# Altium PCB PCB1.PcbDoc
Units mm, origin at the board's own origin, x right, y up, seen from the top; angles counter-clockwise.
Board outline 160 x 100 mm, 2 copper layers (Top Layer, Bottom Layer), stack 1.569 mm thick; 19 components, 13 nets, 106 pads, 187 vias.
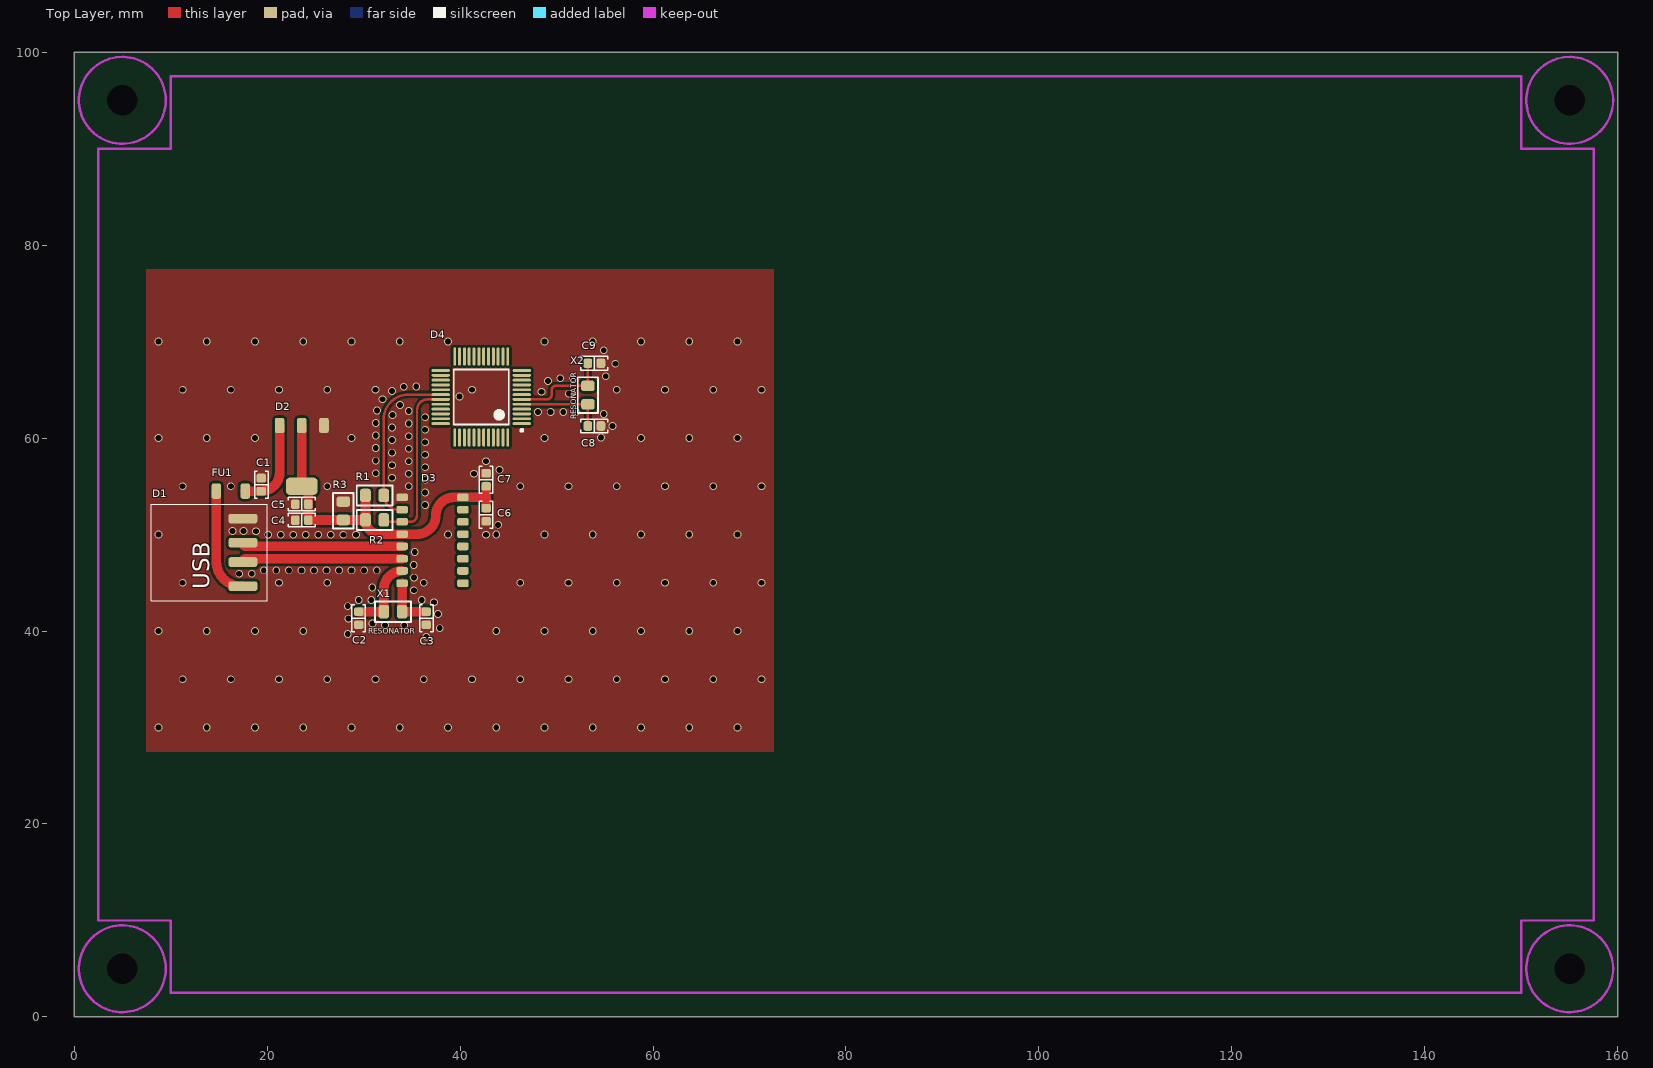
[diagram p0: Top Layer view]
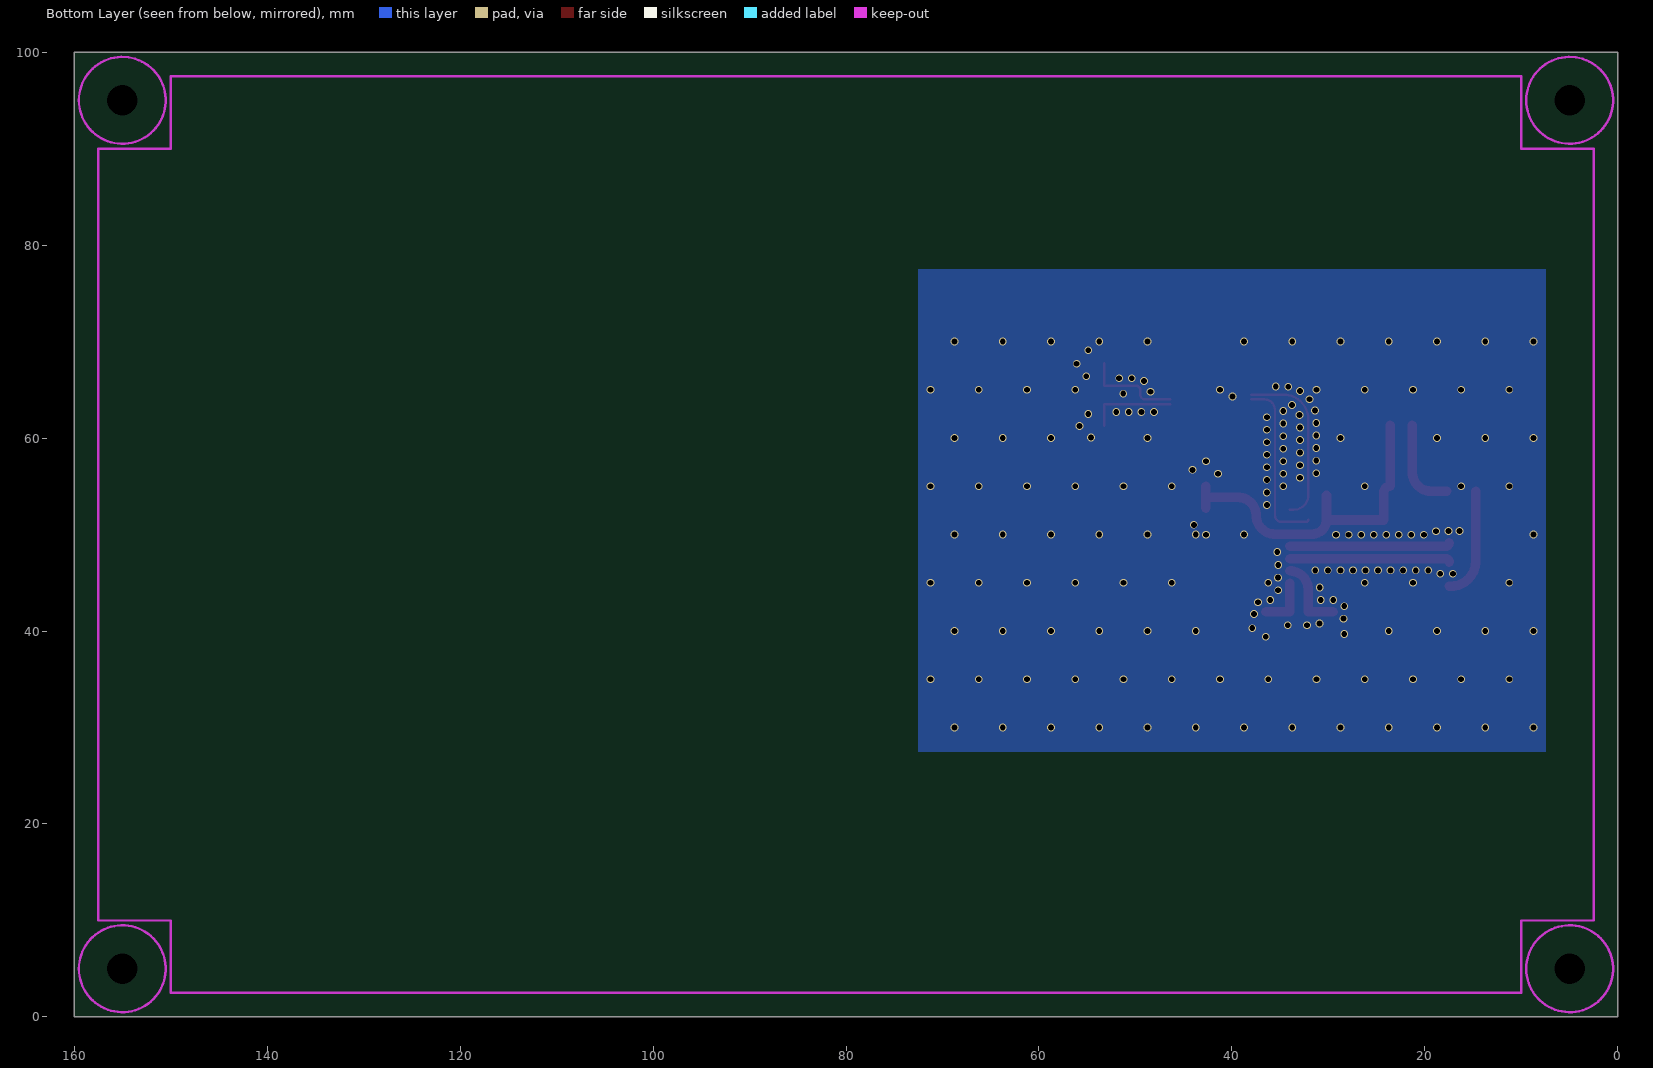
[diagram p1: Bottom Layer view, seen from below]
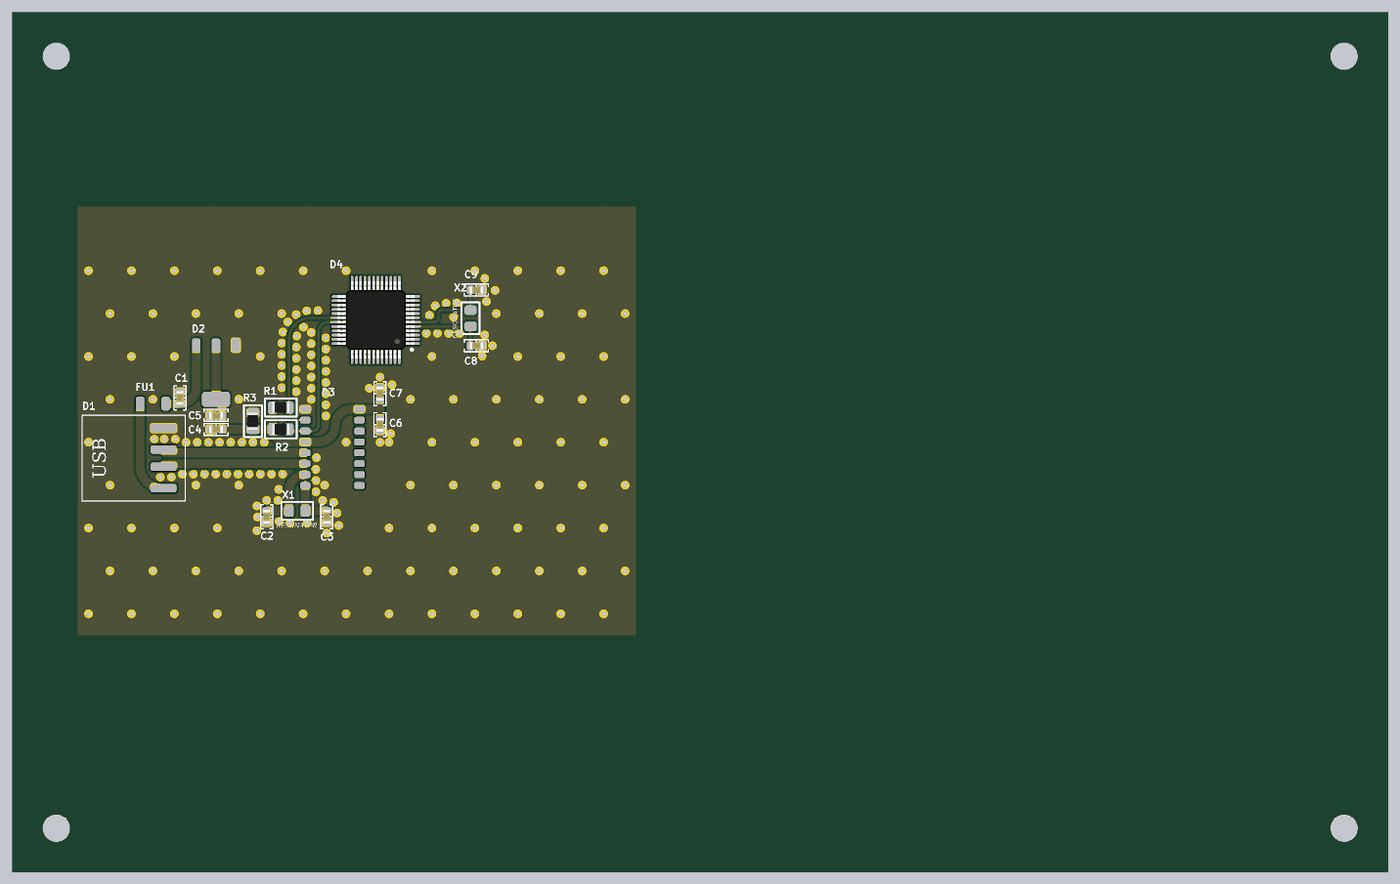
[diagram p2: 3D render of the assembled board from above, using the file's embedded part models]

## Layer stack, top to bottom
Top Solder: solder mask 0.01, Solder Resist, Dk 3.5
Top Layer: signal copper 0.035
Dielectric 1: core 1.4986, Core-043, Dk 4.3
Bottom Layer: signal copper 0.035
Bottom Solder: solder mask 0.01, Solder Resist, Dk 3.5

## Board outline
0,0 0,100 160,100 160,0

## Design rules (kind name [scope] priority, off if disabled: settings)
Clearance [All] p1: gap=0.254 ignorepadtopadclearanceinfootprint=FALSE except(0: Arc-Hole Track-Hole SMDPad-Hole THPad-Hole Via-Hole Fill-Hole Poly-Hole Region-Hole Text-Hole; 0.1: Arc-Arc Arc-Track Arc-SMDPad Track-Track Track-SMDPad SMDPad-SMDPad)
PlaneConnect [All] p1: planeconnectstyle=Direct reliefexpansion=0.508 reliefentries=4 reliefconductorwidth=0.254 reliefairgap=0.254
PolygonConnect [All] p1: connectstyle=Direct reliefconductorwidth=0.254 reliefentries=4 polygonreliefangle="90 Angle" airgapwidth=0.254
RoutingVias [All] p1: holewidth=0.6 width=0.8 viastyle="Through Hole" minholewidth=0.1 minwidth=0.1 maxholewidth=10 maxwidth=10
SolderMaskExpansion [All] p1: expansion=0.102 istentingtop=FALSE
Width [All] p1: maxlimit=5 minlimit=0.254 preferedwidth=1 minimp=50.000000 maximp=50.000000 favimp=50.000000
29 further rules are at their usual default settings.

## Classes and differential pairs
component class Sheet1: C1 C2 C3 C4 C5 C6 C7 C8 C9 D1 D2 D3 D4 FU1 R2 X1 X2 X?

## Components (designator, comment, footprint, x,y, rotation, side; value= is the part's Value field where it differs from the comment)
C1 "Обозначение при заказе" "CAP 0603_1608" 19.4,55.175 r270 top
C2 "Обозначение при заказе" "CAP 0603_1608" 29.5,41.325 r270 top
C3 "Обозначение при заказе" "CAP 0603_1608" 36.5,41.325 r270 top
C4 "Обозначение при заказе" "CAP 0603_1608" 23.6,51.49 r0 top
C5 "Обозначение при заказе" "CAP 0603_1608" 23.6,53.14 r0 top
C6 "Обозначение при заказе" "CAP 0603_1608" 42.7,52.045 r90 top
C7 "Обозначение при заказе" "CAP 0603_1608" 42.7,55.675 r270 top
C8 "Обозначение при заказе" "CAP 0603_1608" 53.925,61.25 r0 top
C9 "Обозначение при заказе" "CAP 0603_1608" 53.925,67.75 r0 top
D1 "USB" USB 17.5,48.15 r90 top
D2 "Обозначение при заказе" AMS1117 23.6,58.15 r180 top
D3 "Обозначение при заказе" ch340g 37.15,49.405 r0 top
D4 "Обозначение при заказе" LQFP-48 42.2,64.25 r180 top
FU1 "Обозначение при заказе" FUSE 16.25,54.5 r0 top
R1 "Обозначение при заказе" R_0805_T0.4 31.15,54.05 r180 top
R2 "Обозначение при заказе" R_0805_T0.4 31.15,51.51 r180 top
R3 "Обозначение при заказе" R_0805_T0.4 27.9,52.46 r90 top
X1 "Обозначение при заказе" "QUARTZ TEMPORARY" 33.05,42 r0 top
X2 "Обозначение при заказе" "QUARTZ TEMPORARY" 53.25,64.45 r90 top

## Footprints (in the part's own frame and the unit in brackets; to place one, negate y for a bottom-side part, rotate by r counter-clockwise, add the part's x,y. Pads: shape width x height; smd on the part's side, far side on the other; paste and mask are expansions set on the pad)
AMS1117 [mm]
  rrect50% 1x1.6 smd: 1(-2.3,-3.15) 2(0,-3.15) 3(2.3,-3.15)
  rrect50% 3.3x1.8 smd: 4(0,3.15)
"CAP 0603_1608" [mm] "Chip Capacitor, 2-Leads, Body 1.60x0.80mm, IPC Medium Density"
  rrect50% 0.9x1 smd: 1(-0.675,0) 2(0.675,0)
  silkscreen extent -1.4,-0.7 1.4,0.7, body extent -0.8,-0.41 0.8,0.41, height 0.82
ch340g [mm]
  rrect50% 1.2x0.8 smd: 1(-3.15,4.445) 2(-3.15,3.175) 3(-3.15,1.905) 4(-3.15,0.635) 5(-3.15,-0.635) 6(-3.15,-1.905) 7(-3.15,-3.175) 8(-3.15,-4.445) 9(3.15,-4.445) 10(3.15,-3.175) 11(3.15,-1.905) 12(3.15,-0.635) 13(3.15,0.635) 14(3.15,1.905) 15(3.15,3.175) 16(3.15,4.445)
  body extent -3,-6 3,6, height 0.25
FUSE [mm]
  rrect50% 1x1.6 smd: 1(-1.5,0) 2(1.5,0)
  body extent -1.5,-0.7 1.5,0.7, height 0.25
LQFP-48 [mm] "TSQFP, 48-Leads, Body 9,0x9,0mm (max), Pitch 0,50mm, IPC Medium Density"
  oval 1.9x0.3 smd: 1(-4.2,2.75) 2(-4.2,2.25) 3(-4.2,1.75) 4(-4.2,1.25) 5(-4.2,0.75) 6(-4.2,0.25) 7(-4.2,-0.25) 8(-4.2,-0.75) 9(-4.2,-1.25) 10(-4.2,-1.75) 11(-4.2,-2.25) 12(-4.2,-2.75) 25(4.2,-2.75) 26(4.2,-2.25) 27(4.2,-1.75) 28(4.2,-1.25) 29(4.2,-0.75) 30(4.2,-0.25) 31(4.2,0.25) 32(4.2,0.75) 33(4.2,1.25) 34(4.2,1.75) 35(4.2,2.25) 36(4.2,2.75)
  oval 0.3x1.9 smd: 13(-2.75,-4.2) 14(-2.25,-4.2) 15(-1.75,-4.2) 16(-1.25,-4.2) 17(-0.75,-4.2) 18(-0.25,-4.2) 19(0.25,-4.2) 20(0.75,-4.2) 21(1.25,-4.2) 22(1.75,-4.2) 23(2.25,-4.2) 24(2.75,-4.2) 37(2.75,4.2) 38(2.25,4.2) 39(1.75,4.2) 40(1.25,4.2) 41(0.75,4.2) 42(0.25,4.2) 43(-0.25,4.2) 44(-0.75,4.2) 45(-1.25,4.2) 46(-1.75,4.2) 47(-2.25,4.2) 48(-2.75,4.2)
  silkscreen extent -4.33,-2.85 2.85,3.57, body extent -4.5,-4.5 4.5,4.5, height 1.5
"QUARTZ TEMPORARY" [mm]
  rrect50% 1.1x1.4 smd mask+0.05: 1(-0.95,0) 2(0.95,0)
  silkscreen extent -1.85,-1.05 1.85,1.05, body extent -1,-0.5 1,0.5, height 1
R_0805_T0.4 [mm] "Чип-резисторы постоянные непроволочные общего применения Р1-8В"
  rrect50% 1.1x1.4 smd mask+0.05: 1(-0.95,0) 2(0.95,0)
  silkscreen extent -1.85,-1.05 1.85,1.05, body extent -1,-0.62 1,0.63, height 0.45
USB [mm]
  rrect50% 1x3 smd: 1(-3.5,0) 2(-1,0) 3(1,0) 4(3.5,0)
  silkscreen extent -5,-2.5 5,9.5

## Part data
C1 C2 C3 C4 C5 C6 C7 C8 C9: library part CAP, "Описание свойств компонента"
D2: library part AMS1117-3.3, "Описание свойств компонента"
D3: library part ch340, "Описание свойств компонента"
D4: library part STM32, "Описание свойств компонента"
FU1: library part MF, "Описание свойств компонента"
R1 R2 R3: library part RES, "Описание свойств компонента"
X1 X2: library part Quartz, "Описание свойств компонента"

## Free pads (board coordinates)
  round 3 hole 3.2 unplated: MTH1(5,5) MTH2(5,95) MTH3(155,95) MTH4(155,5)

## Via types
v1: diameter 0.8, hole 0.6, Top Layer to Bottom Layer, 187 vias

## Nets (pads, with @x,y where several pads share a name; then routed paths per layer and width w, separated by ;. In a path a pad name is that pad's centre, name@x,y a point inside that pad or via, vN(x,y) a via of type N, cw(c..) or ccw(c..) an arc to the next point about the centre after c; other vN are vias at no path point)
+3.3В.1: C4.2 C5.2 C6.2 C7.2 D2.2 D2.4 D3.4 D3.16 R1.2 R2.2 R3.1 | length 36.5
  Top Layer w1: D2.2 D2.4 cw(c23.6,54.325) 24.275,54.325 C5.2 C4.2 cw(c24.295,51.49) 24.295,51.51 R3.1 R2.2 ; R1.2 R2.2 ; C6.2 42.7,53.85 ; C7.2 42.7,53.85 ; R2.2 ccw(c31.67,51.51) 31.67,50.04 D3.4 35.54,50.04 ccw(c35.54,52) 37.5,52 cw(c39.35,52) 39.35,53.85 D3.16 42.7,53.85
+5В.1: C1.2 D2.3 FU1.2 | length 9.5
  Top Layer w1: FU1.2 C1.2 ccw(c19.4,56.4) 21.3,56.4 D2.3
FPGA_RES: D4.26
GND: C1.1 C2.2 C3.2 C4.1 C5.1 C6.1 C7.1 C8.2 C9.2 D1.4 D2.1 D3.1 R3.2
  other v1: 8.75,30 13.75,30 18.75,30 23.75,30 28.75,30 33.75,30 38.75,30 43.75,30 48.75,30 53.75,30 58.75,30 63.75,30 68.75,30 11.25,35 16.25,35 21.25,35 26.25,35 31.25,35 36.25,35 41.25,35 46.25,35 51.25,35 56.25,35 61.25,35 66.25,35 71.25,35 36.5,39.4 28.364,39.7 8.75,40 13.75,40 18.75,40 23.75,40 43.75,40 48.75,40 53.75,40 58.75,40 63.75,40 68.75,40 37.9,40.3 32.221,40.589 34.21,40.589 30.935,40.784 28.435,41.282 37.708,41.754 28.364,42.58 37.305,42.99 29.499,43.216 30.799,43.216 36.025,43.216 35.216,44.233 30.897,44.512 11.25,45 21.25,45 26.25,45 36.25,45 46.25,45 51.25,45 56.25,45 61.25,45 66.25,45 71.25,45 35.227,45.533 17.108,45.939 18.408,45.939 19.661,46.284 20.961,46.284 22.261,46.284 23.561,46.284 24.861,46.284 26.161,46.284 27.461,46.284 28.761,46.284 30.061,46.284 31.361,46.284 35.21,46.838 35.3,48.2 20.111,49.986 21.411,49.986 22.711,49.986 24.011,49.986 25.311,49.986 26.611,49.986 27.911,49.986 29.211,49.986 42.7,49.986 8.75,50 38.75,50 43.75,50 48.75,50 53.75,50 58.75,50 63.75,50 68.75,50 18.863,50.349 16.411,50.361 17.563,50.361 43.95,51 36.384,53.062 36.384,54.362 11.25,55 16.25,55 26.25,55 34.696,54.995 46.25,55 51.25,55 56.25,55 61.25,55 66.25,55 71.25,55 36.384,55.662 32.944,55.889 34.696,56.295 41.45,56.295 31.256,56.359 44.1,56.7 36.384,56.962 32.944,57.189 34.696,57.595 42.7,57.595 31.256,57.659 36.384,58.262 32.944,58.489 34.696,58.895 31.256,58.959 36.384,59.562 32.944,59.789 8.75,60 13.75,60 18.75,60 28.75,60 48.75,60 58.75,60 63.75,60 68.75,60 54.6,60.05 34.696,60.195 31.256,60.259 36.384,60.862 32.944,61.089 55.8,61.25 34.696,61.495 31.256,61.559 36.384,62.162 32.999,62.388 54.9,62.5 48.089,62.703 49.389,62.703 50.689,62.703 51.989,62.703 34.696,62.795 31.385,62.852 33.784,63.424 31.961,64.018 39.95,64.299 51.267,64.603 48.449,64.797 32.94,64.874 11.25,65 16.25,65 21.25,65 26.25,65 31.25,65 41.25,65 56.25,65 61.25,65 66.25,65 71.25,65 34.166,65.306 35.465,65.344 49.128,65.906 50.395,66.197 51.695,66.197 55.1,66.4 56.1,67.7 54.9,69.1 8.75,70 13.75,70 18.75,70 23.75,70 28.75,70 33.75,70 38.75,70 48.75,70 53.75,70 58.75,70 63.75,70 68.75,70
NetC2_1: C2.1 D3.7 X1.1 | length 7.9
  Top Layer w1: C2.1 X1.1 32.1,44.33 cw(c34,44.33) D3.7
NetC3_1: C3.1 D3.8 X1.2 | length 5.5
  Top Layer w1: D3.8 X1.2 C3.1
NetC8_1: C8.1 D4.5 X2.1 | length 9.1
  Top Layer w0.254: D4.5 X2.1 C8.1
NetC9_1: C9.1 D4.6 X2.2 | length 10.2
  Top Layer w0.254: D4.6 49,64 ccw(c49,64.5) 49.5,64.5 49.5,65 cw(c49.9,65) 49.9,65.4 X2.2 C9.1
NetD1_1: D1.1 FU1.1 | length 11.5
  Top Layer w1: FU1.1 14.75,47.19 ccw(c17.29,47.19) 17.29,44.65 D1.1
NetD1_2: D1.2 D3.6 | length 16.7
  Top Layer w1: D1.2 cw(c17.85,47.15) 17.85,47.5 D3.6
NetD1_3: D1.3 D3.5 | length 16.7
  Top Layer w1: D1.3 ccw(c17.88,49.15) 17.88,48.77 D3.5
RX.1: D3.3 D4.31 R2.1 | length 17.9
  Top Layer w0.254: R2.1 ccw(c32.3,51.51) 32.3,51.31 D3.3 34.85,51.31 ccw(c34.85,52) 35.54,52 35.54,62.9 cw(c36.64,62.9) 36.64,64 D4.31
TX.1: D3.2 D4.30 R1.1 | length 18
  Top Layer w0.254: D3.2 33.57,52.58 cw(c33.57,54.05) R1.1 32.1,61.96 cw(c34.64,61.96) 34.64,64.5 D4.30
pads on no net: D3.9 D3.10 D3.11 D3.12 D3.13 D3.14 D3.15 D4.1 D4.2 D4.3 D4.4 D4.7 D4.8 D4.9 D4.10 D4.11 D4.12 D4.13 D4.14 D4.15 D4.16 D4.17 D4.18 D4.19 D4.20 D4.21 D4.22 D4.23 D4.24 D4.25 D4.27 D4.28 D4.29 D4.32 D4.33 D4.34 D4.35 D4.36 D4.37 D4.38 D4.39 D4.40 D4.41 D4.42 D4.43 D4.44 D4.45 D4.46 D4.47 D4.48

## Polygon pours and split planes (outlines as drawn)
GND on Top Layer "GND_L01_P000" (solid, remove dead copper, pour order 0): 7.5,77.5 72.5,77.5 72.5,27.5 7.5,27.5
GND on Bottom Layer "GND_L02_P001" (solid, remove dead copper, pour order 1): 7.5,77.5 72.5,77.5 72.5,27.5 7.5,27.5

## Keep-outs
Keep-Out Layer:
  circle w0.25: c5,95 r4.5
  circle w0.25: c155,95 r4.5
  circle w0.25: c155,5 r4.5
  circle w0.25: c5,5 r4.5
  lines w0.254: 2.5,10 2.5,90 10,90 10,97.5 150,97.5 150,90 157.5,90 157.5,10 150,10 150,2.5 10,2.5 10,10 2.5,10

## Silkscreen, mask and mechanical layers (free items; w line width, h text height)
Board Outline:
  lines w0.1: 5,25 5,80 75,80 75,25 5,25
  lines w0.25: 0,0 160,0 160,100 0,100 0,0

## Dimensions
155,95 to 171.075,107.95 on Board Dimensions
160,100 to 160,0 on Board Dimensions
0,100 to 160,100 on Board Dimensions

## Text inside footprints (layer, text, board x,y; h text height)
X1: Top Overlay "RESONATOR" at 30.48,39.5 h1
X2: Top Overlay "RESONATOR" at 52.25,61.95 h1 r90